# EAGLE board Main (EAGLE 7.2.0)
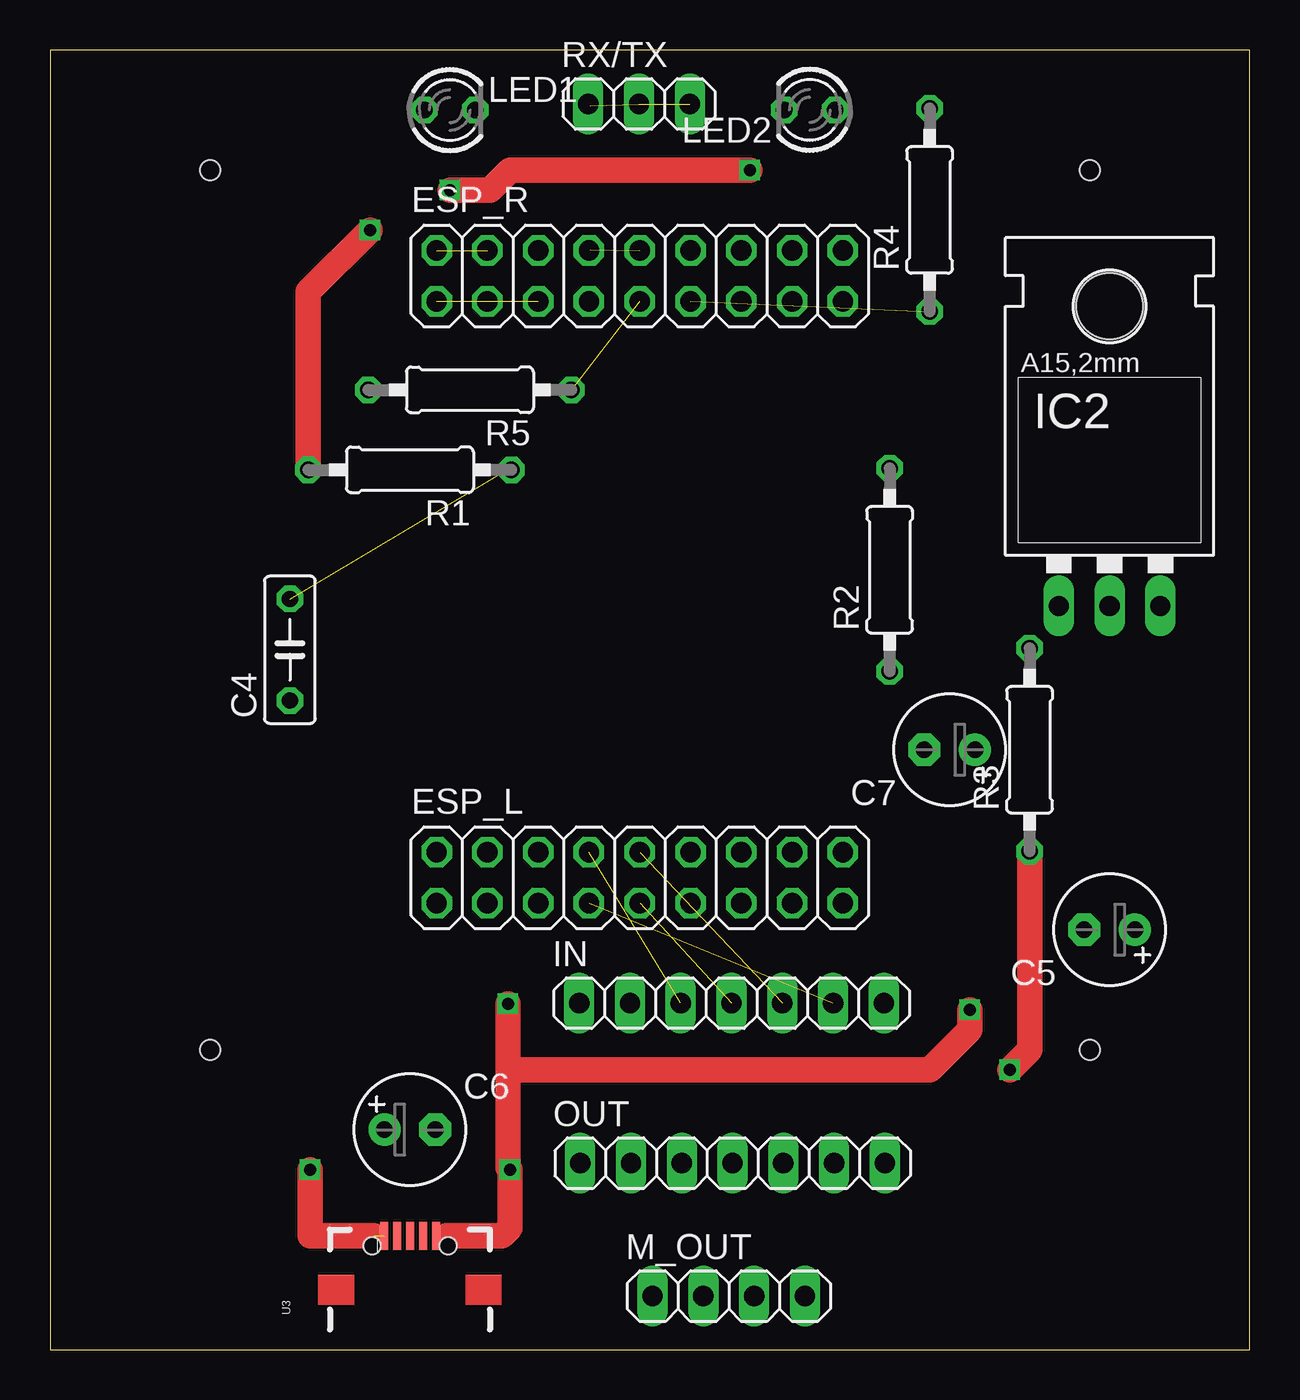
[diagram p0: board, top side]
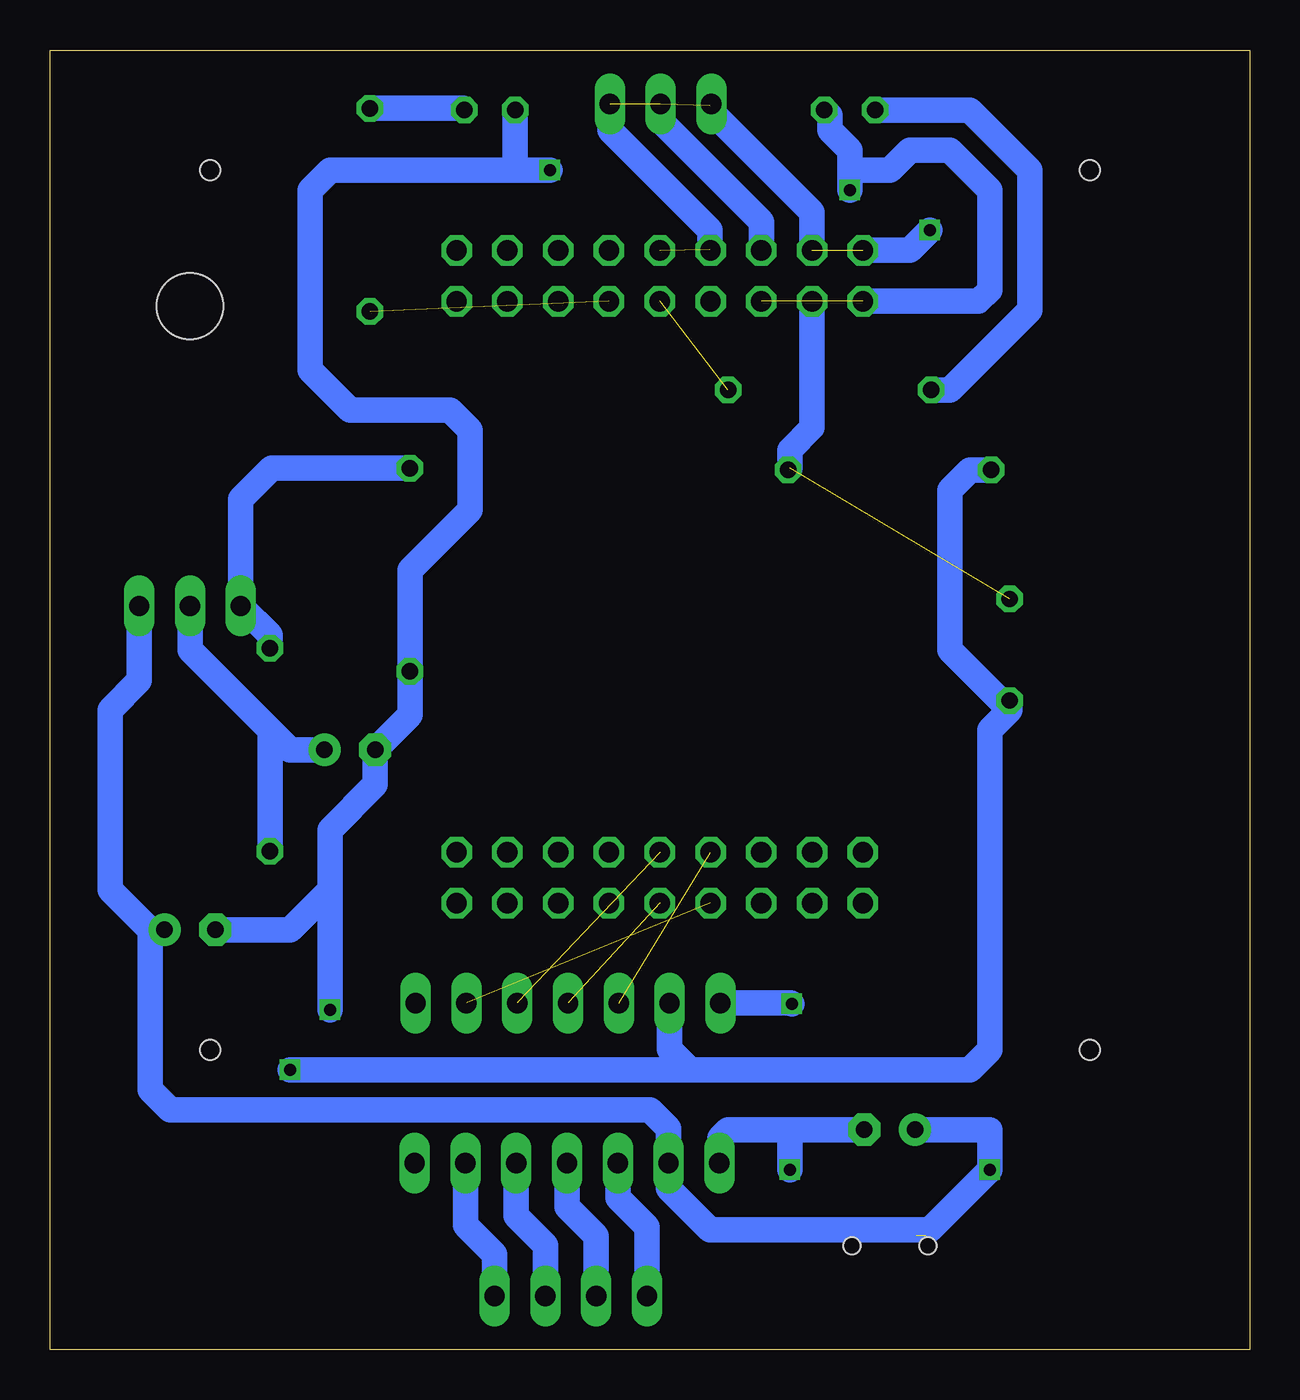
[diagram p1: board, bottom side, seen from below]

Size 60 x 65 mm. Coordinates in mm from the lower left corner, seen from the top.
Outline: 0,0 60,0 60,65 0,65 0,0
Copper layers (1*16): Top 0.035mm / dielectric 1.5mm / Bottom 0.035mm
Design rules "default": minimum track width 6mil, minimum drill 0.35mm, track to track 6mil, track to pad 6mil, pad to pad 6mil, via to via 6mil, smd to smd 6mil, copper to edge 40mil, drill to drill 6mil, minimum pad ring 10mil, minimum via ring 8mil, stop-mask expansion 4mil, vias tented up to drill 0mil, thermal gap 10mil
Holes 1 mm at 8,15 52,15 8,59 52,59

## Footprints (pad centres in the part's own frame; a part is rotated, then mirrored left to right if it is on the bottom)
C050-025X075 = drill 0.813 octagon: 1 -2.54,0; 2 2.54,0
E2,5-6 = drill 0.813 pad 1.6: + -1.27,0 | drill 0.813 pad 1.6 octagon: - 1.27,0
2X09 = drill 1.016 octagon: 1 -10.16,-1.27; 2 -10.16,1.27; 3 -7.62,-1.27; 4 -7.62,1.27; 5 -5.08,-1.27; 6 -5.08,1.27; 7 -2.54,-1.27; 8 -2.54,1.27; 9 0,-1.27; 10 0,1.27; 11 2.54,-1.27; 12 2.54,1.27; 13 5.08,-1.27; 14 5.08,1.27; 15 7.62,-1.27; 16 7.62,1.27; 17 10.16,-1.27; 18 10.16,1.27
317TL = drill 1.016 long: 1 -2.54,-3.81; 2 0,-3.81; 3 2.54,-3.81 | hole 3.302: 0,11.176
1X07 = drill 1.016 long: 1 -7.62,0; 2 -5.08,0; 3 -2.54,0; 4 0,0; 5 2.54,0; 6 5.08,0; 7 7.62,0
LED3MM = drill 0.813 octagon: A -1.27,0; K 1.27,0
1X04 = drill 1.016 long: 1 -3.81,0; 2 -1.27,0; 3 1.27,0; 4 3.81,0
0207/10 = drill 0.813 octagon: 1 -5.08,0; 2 5.08,0
1X03 = drill 1.016 long: 1 -2.54,0; 2 0,0; 3 2.54,0
USB-MICRO-SMD = smd 1.4 x 0.4: D+1 2.7,0; D-1 2.7,0.65; GND1 2.7,-1.3; ID1 2.7,-0.65; VBUS1 2.7,1.3 | hole 0.85: 2.2,1.9; 2.2,-1.9

## Placement (x,y rotation side)
C4  10uF  [C050-025X075]  12,35 90 top
C5  100uF  [E2,5-6]  53,21 180 top
C6  220uF  [E2,5-6]  18,11 0 top
C7  400uF  [E2,5-6]  45,30 180 top
ESP_L  [2X09]  29.5,23.6 0 top
ESP_R  [2X09]  29.5,53.7 0 top
IC2  [317TL]  53,41 0 top
IN  [1X07]  34.09,17.33 0 top
LED1  TLLG4400  [LED3MM]  20,62 0 top
LED2  TLLG4400  [LED3MM]  38,62 180 top
M_OUT  [1X04]  33.95,2.67 0 top
OUT  [1X07]  34.14,9.32 0 top
R1  12k  [0207/10]  18,44 180 top
R2  390  [0207/10]  42,39 90 top
R3  240  [0207/10]  49,30 90 top
R4  10k  [0207/10]  44,57 90 top
R5  10k  [0207/10]  21,48 180 top
RX/TX  [1X03]  29.46,62.3 0 top
U3  [USB-MICRO-SMD]  18,3 90 top

## Library data of the parts
C4 = resistor
C5-C7 R1-R5 = rcl
ESP_L ESP_R IN M_OUT OUT RX/TX = pinhead
IC2 = v-reg
LED1 LED2 = led; MF: VISHAY SEMICONDUCTOR; OC_FARNELL: 1612435
U3 = MicroUSB

## Nets
EN1: ESP_L.8 IN.3
EN2: ESP_L.10 IN.5
ENC_L: ESP_L.4
ENC_R: ESP_R.18
LED1: ESP_R.9 R5.1
LED2: ESP_R.11 R4.1
N$1: M_OUT.1 OUT.3
N$2: M_OUT.2 OUT.4
N$3: M_OUT.3 OUT.5
N$4: M_OUT.4 OUT.6
N$7: IC2.1 R2.2 R3.2
N$10: LED2.A R4.2
N$12: C4.2 C5.- C6.- C7.- ESP_R.1 ESP_R.3 ESP_R.5 IN.1 LED1.K LED2.K OUT.1 R1.1 R2.1 U3.GND1
N$13: LED1.A R5.2
PH1: ESP_L.9 IN.4
PH2: ESP_L.7 IN.6
VCC: C4.1 C7.+ ESP_R.2 ESP_R.4 ESP_R.6 ESP_R.8 ESP_R.10 IC2.2 IN.2 R1.2 R3.1 RX/TX.1 RX/TX.2 RX/TX.3
VDD: C5.+ C6.+ IC2.3 OUT.2 U3.VBUS1

## Tracks (layer width: path | path; a pad name or v marks a point on that pad's centre or on a via)
EN1  (1 unrouted)
EN2  (1 unrouted)
LED1  (1 unrouted)
LED2  (1 unrouted)
N$1
  Bottom 1.27: M_OUT.1 30.14,6.14 31.6,7.6 OUT.3
N$2
  Bottom 1.27: M_OUT.2 32.68,5.68 34.14,7.14 OUT.4
N$3
  Bottom 1.27: OUT.5 36.68,6.68 35.22,5.22 M_OUT.3
N$4
  Bottom 1.27: M_OUT.4 37.76,4.76 39.22,6.22 OUT.6
N$7
  Bottom 1.27: R2.2 48.92,44.08 50.46,42.54 IC2.1 49,35.73 R3.2
N$10
  Bottom 1.27: R4.2 39.35,62.08 LED2.A
N$12  (via drill 0.6)  (3 unrouted)
  Top 0.305: 19.8,5.7 U3.GND1
  Top 1.27: v35,59 23,59 22,58 v20,58 | 19.8,5.7 22.6,5.7 23,6.1 v23,9 22.9,9.1 22.9,14 | v22.9,17.3 22.9,14 | v46,17 46,16 44,14 22.9,14
  Bottom 1.27: v20,58 20,59 | 20,59 20,60 21,61 21,61.73 LED1.K | 20,59 18,59 17,60 15,60 13,58 13,53 13.57,52.43 ESP_R.1 | 23,11 26.1,11 26.5,10.6 26.5,9.34 OUT.1 | C6.- 23,11 | 23,11 v23,9 | 37,59 46,59 47,58 47,49 45,47 40,47 39,46 39,42 42,39 R2.1 42,31.73 C7.- 43.73,28.27 46,26 46,23 | 37,59 v35,59 | LED2.K 36.73,59.27 37,59 | IN.1 22.93,17.33 v22.9,17.3 | 46,23 48,21 C5.- | 46,23 v46,17 | ESP_R.3 21.88,46.12 23,45 23,44.08 R1.1
N$13
  Bottom 1.27: LED1.A 14,62 11,59 11,52 15,48 R5.2
PH1  (1 unrouted)
PH2  (1 unrouted)
VCC  (via drill 0.6)  (4 unrouted)
  Top 1.27: R1.2 12.92,52.92 v16,56 | R3.1 49,15 v48,14
  Bottom 1.27: IN.2 29.01,15.01 28,14 | 28,14 14,14 13,15 13,31 12,32 C4.1 12.46,32.46 15,35 15,43 14,44 R1.2 | IC2.2 53,35 49,31 | 49,31 48,30 C7.+ | R3.1 49,31 | v16,56 17,55 19.31,55 ESP_R.2 | v48,14 28,14 | RX/TX.3 32,61 27,56 27,55.01 ESP_R.8 | ESP_R.6 24.42,56.42 29.46,61.46 RX/TX.2 | ESP_R.4 21.88,56.88 27,62 27,62.22 RX/TX.1
VDD  (via drill 0.6)  (1 unrouted)
  Top 1.27: 16.2,5.7 13,5.7 v13,9
  Bottom 1.27: IC2.3 55.54,33.46 57,32 57,23 55,21 | 55,21 C5.+ | C6.+ 13,11 v13,9 16,6 27,6 29.06,8.06 OUT.2 29.06,11.06 30,12 54,12 55,13 55,21